# Altium PCB PCB.PcbDoc
Units mm, origin at the board's own origin, x right, y up, seen from the top; angles counter-clockwise.
Board outline 45.4 x 99.85 mm, 2 copper layers (Top Layer, Bottom Layer); 75 components, 50 nets, 225 pads, 76 vias.
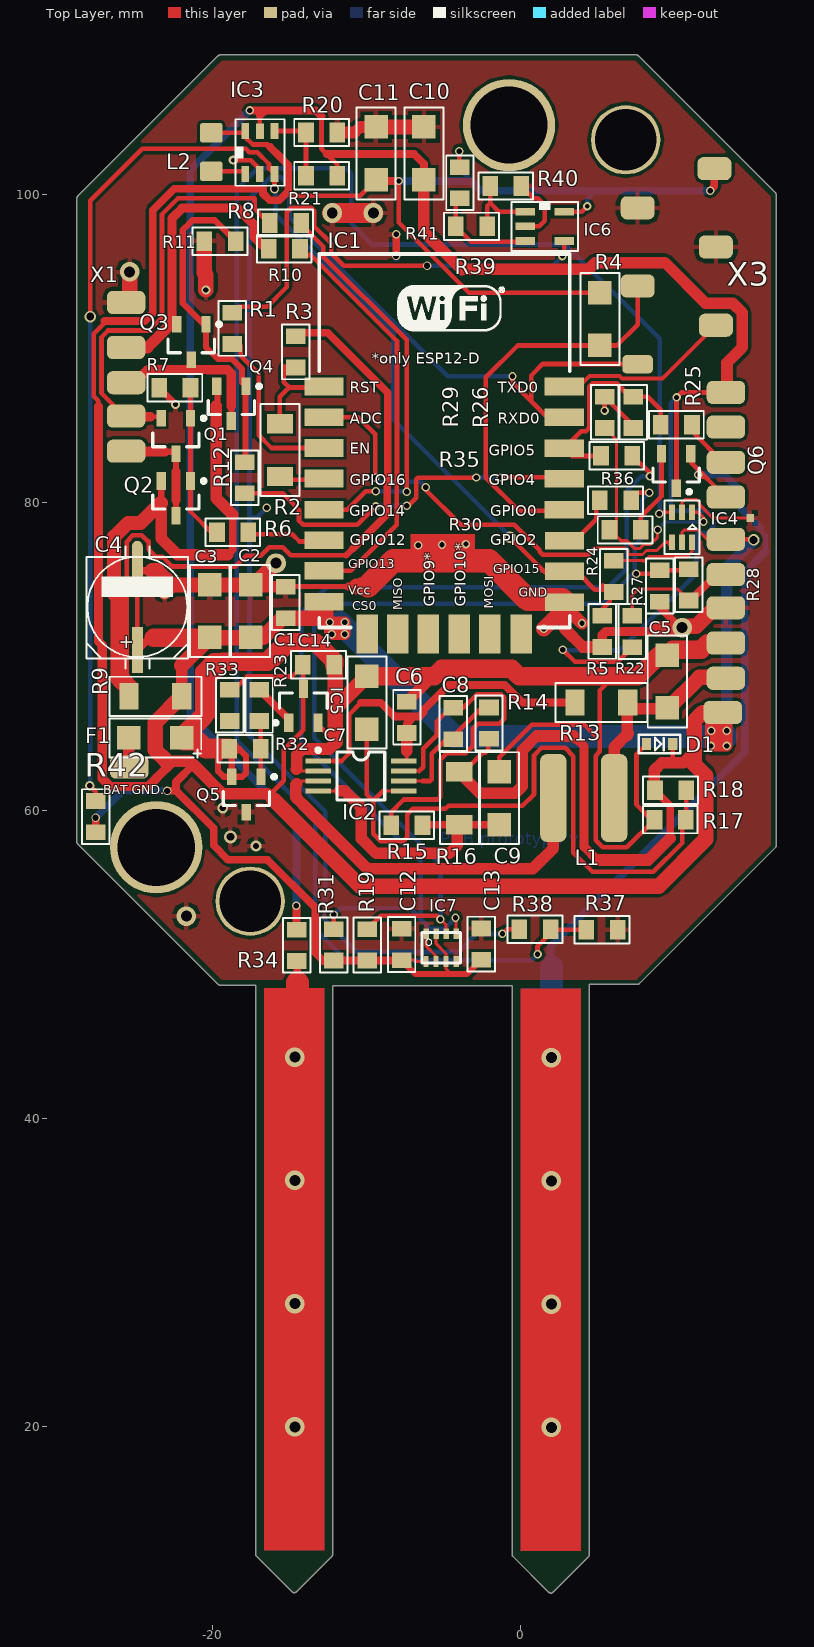
[diagram p0: Top Layer view]
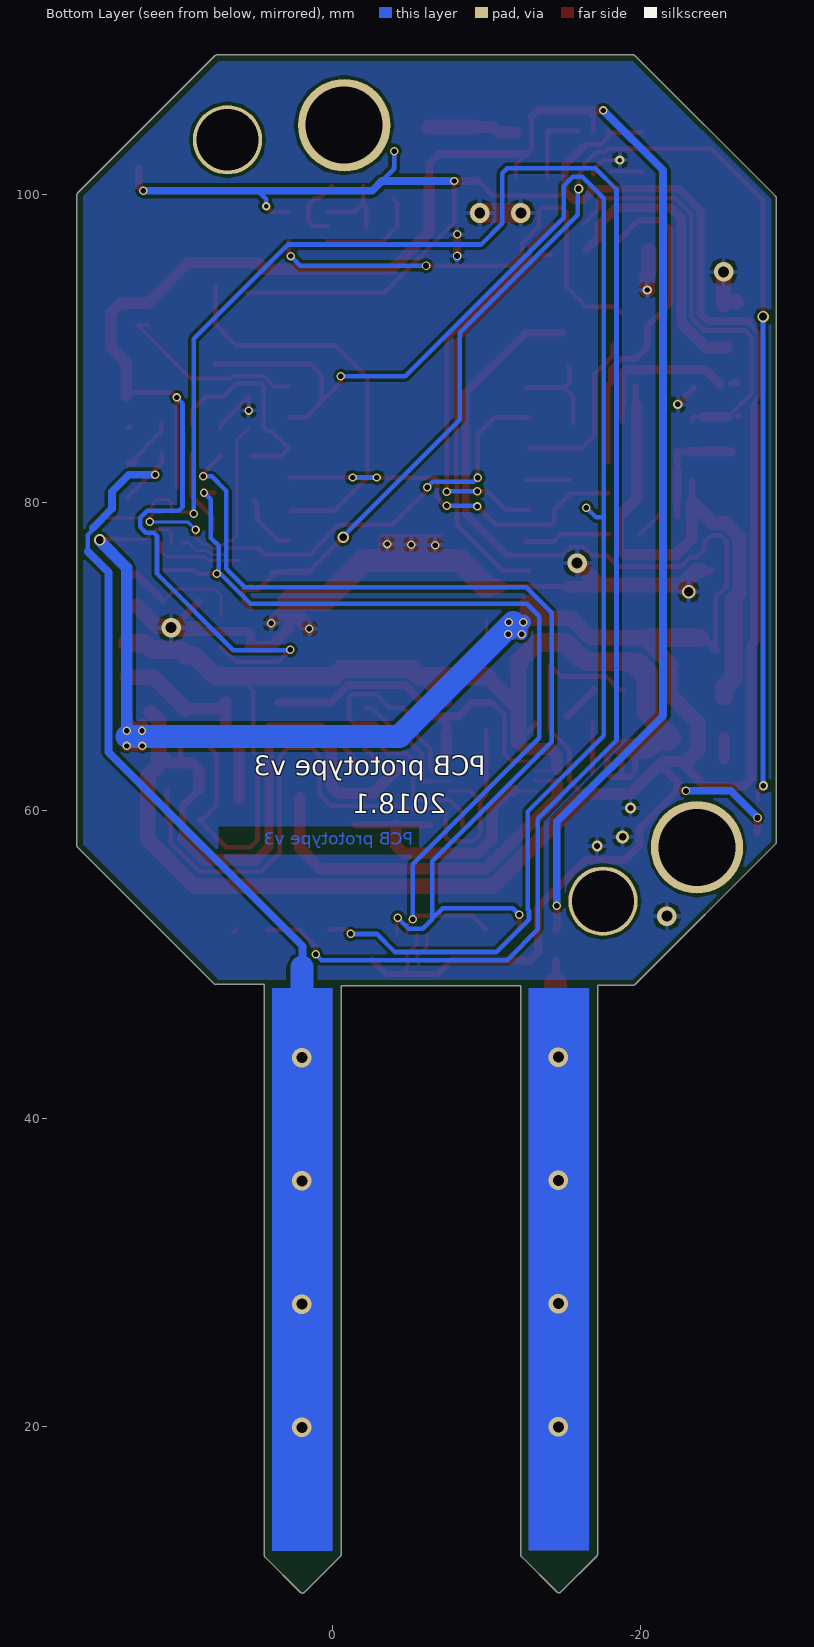
[diagram p1: Bottom Layer view, seen from below]

## Layer stack, top to bottom
Top Layer: signal copper 0.0356
Dielectric: dielectric 0.32, FR-4, Dk 4.8
Bottom Layer: signal copper 0.0356

## Board outline
-17.2,11.725 ccw(c-17,11.725) -17.142,11.583 -14.829,9.271 ccw(c-14.687,9.413) -14.546,9.271 -12.258,11.558 ccw(c-12.4,11.7) -12.2,11.7 -12.2,48.625 -0.55,48.625 -0.55,11.7 ccw(c-0.35,11.7) -0.492,11.558 1.821,9.246 ccw(c1.963,9.387) 2.104,9.246 4.392,11.533 ccw(c4.25,11.675) 4.45,11.675 4.45,48.7 7.574,48.7 ccw(c7.574,48.9) 7.716,48.758 16.542,57.584 ccw(c16.4,57.726) 16.6,57.726 16.6,99.946 ccw(c16.4,99.946) 16.542,100.088 7.652,108.978 ccw(c7.51,108.836) 7.51,109.036 -19.49,109.036 ccw(c-19.49,108.836) -19.632,108.978 -28.742,99.868 ccw(c-28.6,99.726) -28.8,99.726 -28.8,57.946 ccw(c-28.6,57.946) -28.742,57.804 -19.646,48.708 ccw(c-19.504,48.85) -19.504,48.65 -17.2,48.65

## Design rules (kind name [scope] priority, off if disabled: settings)
Clearance [All] p1: gap=0.2
ComponentClearance [All] p1: gap=0.254 collisioncheckmode=3 verticalgap=0.254 showdistances=TRUE
HoleSize [All] p1: absolutevalues=TRUE maxlimit=6.2 minlimit=0.25 maxpercent=80.000 minpercent=20.000
HoleToHoleClearance [All] p1: gap=0.508 allowstackedmicrovias=TRUE
MinimumAnnularRing [All] p1: minimumring=0.076
MinimumSolderMaskSliver [All] p1: minsoldermaskwidth=0.096
PlaneConnect [All] p1: planeconnectstyle=Relief reliefexpansion=0.508 reliefentries=4 reliefconductorwidth=0.5 reliefairgap=0.254
PolygonConnect [All] p1: connectstyle=Relief reliefconductorwidth=0.3 reliefentries=4 polygonreliefangle="90 Angle" airgapwidth=0.254
RoutingCorners [All] p1: cornerstyle=45-Degree minsetback=0.15 maxsetback=5
RoutingVias [All] p1: holewidth=0.45 width=0.6 viastyle="Through Hole" minholewidth=0.4 minwidth=0.55 maxholewidth=6 maxwidth=6.15
SMDNeckDown [All] p1: percent=75.000
ShortCircuit [All] p1 off: allowed=FALSE
SilkToSilkClearance [All] p1 off: silktosilkclearance=0.1
SilkToSolderMaskClearance SilkToSolderMaskClearance_1 [IsPad] p1 off: minsilkscreentomaskgap=0.254 clearancetoexposedcopper=TRUE
SolderMaskExpansion [All] p1: expansion=0.102
Width [All] p1: maxlimit=6 minlimit=0.2 preferedwidth=0.75
19 further rules are at their usual default settings.

## Classes and differential pairs
net class "Voltage Booster": +5V GND GPIO15 NetIC3_1 NetIC3_4 VCC
net class SPV1040: "GND PV." NetC6_1 NetC7_1 NetC8_1 NetC8_2 NetC9_2 NetIC2_3 PV. VCC
net class H-Bridge: GND MOTOR_CONTROL1 MOTOR_CONTROL2 MOTOR_SENSOR1 MOTOR_SENSOR2 NetQ1_1 NetQ1_2 NetQ1_3 NetQ2_2 NetQ3_1 NetQ3_2 NetQ3_3 VCC
net class ESP8266: ADC DELAYED_RESET EN FLOWMETER GND "GND PV." GPIO15 MOTOR_CONTROL1 MOTOR_CONTROL2 MOTOR_SENSOR1 MOTOR_SENSOR2 NetIC1_1 NetIC1_3 NetIC1_4 NetIC1_17 NetIC1_18 NetIC1_22 RXD/VCC SCL SDA/DHT VCC

## Components (designator, comment, footprint, x,y, rotation, side; value= is the part's Value field where it differs from the comment)
C1 "1nF" 0805C-TBD -15.25,72.725 r90 top
C2 "100nf" 1206C-GENERIC -17.525,71.225 r90 top
C3 "22uF" 1206C-GENERIC -20.175,71.225 r90 top
C4 "470uF" PANACAP-D-GENERIC -24.875,73.2 r90 top
C5 "22uF" 1206C-GENERIC 9.525,66.65 r90 top
C6 "1nF" 0805C-TBD -7.375,65.275 r90 top
C7 "1nF" 1206C-GENERIC -9.975,65.275 r90 top
C8 "1uF" 0805C-TBD -4.375,66.4 r270 top
C9 "22uF" 1206C-GENERIC -1.375,62.5 r270 top
C10 "10uF" 1206C-GENERIC -6.275,100.928 r90 top
C11 "22uF" 1206C-GENERIC -9.375,100.928 r90 top
C12 "100nF" 0805C-GENERIC -7.725,50.525 r90 top
C13 "100nF" 0805C-GENERIC -2.55,50.55 r90 top
C14 "22uF" 0805C-GENERIC -13.875,69.45 r0 top
D1 "DIODE-TRANSIL-GENERIC" SOD523 9.875,64.3 r180 top
F1 "" Fuse_1206 -20.6,67.575 r180 top
IC1 "ESP8266 ESP-12-E" "ESP8266 ESP-12-E" 3.825,71.1 r0 top
IC2 "SPV1040" SPV1040 -15.7,66.675 r270 top
IC3 "MCP1623" SOT23-6 -17.875,101.428 r90 top
IC4 "FSA3157" SC70-6 11.125,79.35 r180 top
IC5 "TC54VN2702ECB713" SOT-23A-CB3_L -14.097,66.777 r90 top
IC6 "MAX6433-MAX6435" SOT23-5 0.305,98.857 r0 top
IC7 "BMP280" BMP280 -3.675,49.825 r90 top
L1 "INDUCTOR" "Inductor 6x6mm" 6.075,60.8 r180 top
L2 "INDUCTOR" INDM2520X190N -20.075,102.728 r90 top
Q1 "BSS806N" INF-PG-SOT23_N -22.375,84.3 r270 top
Q2 "IRLML6401" Micro3_N -22.375,80.25 r270 top
Q3 "BSS806N" INF-PG-SOT23_N -21.375,90.4 r270 top
Q4 "IRLML2246" Micro3_N -18.775,86.4 r270 top
Q5 "IRLML6244" INF-PG-SOT23_N -17.8,61.025 r270 top
Q6 "2N3904" SOT23_N 10.1,82.025 r270 top
R1 "4.7K" 0805R-10K -18.725,92.3 r270 top
R2 "0 vagy talan 1K?" 1206FB-50Z -15.625,85.1 r270 top
R3 "10K" 0805R-10K -14.6,90.775 r270 top
R4 "10K" 1206C-GENERIC 5.15,90.175 r90 top
R5 "10K" 0805R-10K 5.3,70.6 r90 top
R6 "390R" 0805R-390 -17.925,78.05 r180 top
R7 "10K" 0805R-10K -21.425,87.425 r180 top
R8 "1K" 0805R-1K -14.5,98.125 r180 top
R9 "1R" 1206FB-50Z -25.425,67.4 r0 top
R10 "1K" 0805R-1K -16.1,96.45 r0 top
R11 "10K" 0805R-10K -18.5,96.95 r180 top
R12 "390R" 0805R-390 -17.9,82.35 r270 top
R13 "1K" 1206FB-50Z 3.525,67 r0 top
R14 "1K" 0805R-1K -2.05,64.9 r90 top
R15 "1K" 0805R-1K -6.625,59.025 r180 top
R16 "530m" 1206FB-50Z -3.975,62.5 r270 top
R17 "360K" 0805R-680K 10.475,59.4 r180 top
R18 "680K" 0805R-680K 8.975,61.3 r0 top
R19 "4K7" 0805R-4K7 -9.95,52.025 r270 top
R20 "261k" 0805R-820K -13.675,104 r0 top
R21 "820k" 0805R-560K -13.675,101.2 r0 top
R22 "4K7" 0805R-4K7 7.25,70.85 r90 top
R23 "470R" 0805R-470 -16.975,67.575 r270 top
R24 "390R" 0805R-390 6.05,74.425 r90 top
R25 "2k2" 0805R-4K7 9.35,85.025 r0 top
R26 "3k3" 0805R-4K7 7.325,85.075 r90 top
R27 "3k3" 0805R-4K7 9.025,73.8 r90 top
R28 "2k2" 0805R-4K7 10.925,75.4 r270 top
R29 "2k2" 0805R-4K7 5.45,86.6 r270 top
R30 "8k2" 0805R-4K7 6.025,78.2 r0 top
R31 "4K7" 0805R-4K7 -12.125,52.025 r270 top
R32 "150K" 0805R-150K -17.125,64 r180 top
R33 "10K" 0805R-10K -18.875,65.8 r90 top
R34 "100R" 0805R-100 -14.525,52 r270 top
R35 "22R" 0805R-22 7,83.025 r180 top
R36 "22R" 0805R-22 6.925,80.125 r180 top
R37 "2k2 1%" 0805R-1K 6.05,52.25 r180 top
R38 "8k2 1%" 0805R-4K7 0.171,52.275 r0 top
R39 "931K" 0805R-TBD -3.937,99.974 r90 top
R40 "237K" 0805R-TBD -1.725,100.525 r0 top
R41 "22K" 0805R-TBD -3.95,97.9 r0 top
R42 "0" 0805R-TBD -27.584,58.826 r90 top
X1 "Component_1" Szelep_csati -26.875,82.55 r0 top
X3 "X?" "program port" 7.6,88.95 r0 top

## Footprints (in the part's own frame and the unit in brackets; to place one, negate y for a bottom-side part, rotate by r counter-clockwise, add the part's x,y. Pads: shape width x height; smd on the part's side, far side on the other; paste and mask are expansions set on the pad)
0805C-GENERIC [mil] "CAPACITOR 0805"
  rect 40x50 smd: 1(-10,0) 2(70,0)
  silkscreen extent -40,-35 100,35, body extent -11,-25 70,25, height 26
0805C-TBD [mil] "CAPACITOR 0805"
  rect 40x50 smd: 1(-10,0) 2(70,0)
  silkscreen extent -40,-35 100,35, body extent -11,-25 70,25, height 26
0805R-1K [mil] "RESISTOR 0805"
  rect 40x50 smd: 1(-10,0) 2(70,0)
  silkscreen extent -40,-35 100,35, body extent -11,-25 70,25, height 27
0805R-4K7 [mil] "RESISTOR 0805"
  rect 40x50 smd: 1(-10,0) 2(70,0)
  silkscreen extent -40,-35 100,35, body extent -11,-25 70,25, height 27
0805R-10K [mil] "RESISTOR 0805"
  rect 40x50 smd: 1(0,0) 2(80,0)
  silkscreen extent -30,-35 110,35, body extent -1,-25 80,25, height 27
0805R-22 [mil] "RESISTOR 0805"
  rect 40x50 smd: 1(-10,0) 2(70,0)
  silkscreen extent -40,-35 100,35, body extent -11,-25 70,25, height 27
0805R-100 [mil] "RESISTOR 0805"
  rect 40x50 smd: 1(-10,0) 2(70,0)
  silkscreen extent -40,-35 100,35, body extent -11,-25 70,25, height 27
0805R-150K [mil] "RESISTOR 0805"
  rect 40x50 smd: 1(-10,0) 2(70,0)
  silkscreen extent -40,-35 100,35, body extent -11,-25 70,25, height 27
0805R-390 [mil] "RESISTOR 0805"
  rect 40x50 smd: 1(-10,0) 2(70,0)
  silkscreen extent -40,-35 100,35, body extent -11,-25 70,25, height 27
0805R-470 [mil] "RESISTOR 0805"
  rect 40x50 smd: 1(-10,0) 2(70,0)
  silkscreen extent -40,-35 100,35, body extent -11,-25 70,25, height 27
0805R-560K [mil] "RESISTOR 0805"
  rect 40x50 smd: 1(-10,0) 2(70,0)
  silkscreen extent -40,-35 100,35, body extent -11,-25 70,25, height 27
0805R-680K [mil] "RESISTOR 0805"
  rect 40x50 smd: 1(-10,0) 2(70,0)
  silkscreen extent -40,-35 100,35, body extent -11,-25 70,25, height 27
0805R-820K [mil] "RESISTOR 0805"
  rect 40x50 smd: 1(-10,0) 2(70,0)
  silkscreen extent -40,-35 100,35, body extent -11,-25 70,25, height 27
0805R-TBD [mil] "RESISTOR 0805 VALUE TO BE DETERMINED"
  rect 40x50 smd: 1(-10,0) 2(70,0)
  silkscreen extent -40,-35 100,35, body extent -11,-25 70,25, height 27
1206C-GENERIC [mil] "Polarized Capacitor (Radial); 2 Leads"
  rect 60x60 smd: 1(0,0) 2(135,0)
  silkscreen extent -50,-50 185,50, body extent -8,-29 147,29, height 46
1206FB-50Z [mm] "FERRITE BEAD 1206"
  rect 1.25x1.7 smd: 1(0,0) 2(3.429,0)
  silkscreen extent -1.27,-1.27 4.7,1.27, body extent 0.11,-0.81 3.31,0.8, height 0.84
BMP280 [mm]
  rect 0.7x0.35 smd: 1(2.156,2.458) 2(2.156,1.808) 3(2.156,1.158) 4(2.156,0.508) 5(0.358,0.501) 6(0.358,1.164) 7(0.358,1.814) 8(0.358,2.464)
  silkscreen extent 0.25,0.23 2.25,2.73
"ESP8266 ESP-12-E" [mil] "ESP8266 ESP-12-E"
  rect 100x45 smd: 1(-653,646) 2(-653,568) 3(-653,489) 4(-653,411) 5(-653,331) 6(-653,253) 7(-653,175) 8(-653,96) 15(-38,95) 16(-38,174) 17(-38,252) 18(-39,331) 19(-39,410) 20(-39,488) 21(-39,568) 22(-39,646)
  rect 55x100 smd: 9(-543,14) 10(-465,14) 11(-387,14) 12(-307,14) 13(-229,14) 14(-149,14)
  silkscreen extent -665,30 -25,985, body extent -661,37 -31,981, height 86
Fuse_1206 [mil]
  rect 60x60 smd: 1(55,113) 2(190,113)
  silkscreen extent 5,63 240,163
INDM2520X190N [mm] "Inductor, molded body 2.5x2.0mm"
  round 0.508 on Mech15: 0(0,0)
  rrect20% 1.25x1.45 smd: 1(-1.25,0) 2(1.25,0)
  Top Layer pour cut-out: -0.7,1 0.7,1 0.7,-1 -0.7,-1
  body extent -1.25,-1 1.25,1, height 1.79
"Inductor 6x6mm" [mm]
  rrect50% 1.7x5.7 smd: 1(0,0) 2(3.95,0)
INF-PG-SOT23_N [mm] "SOT23, 3-Leads, Body 2.9x1.3mm, Pitch 0.95mm, IPC Medium Density"
  rect 1.05x0.6 smd: 1(-1.15,0.95) 2(-1.15,-0.95) 3(1.15,0)
  silkscreen extent -1.27,-1.5 0.7,1.93, body extent -0.7,-1.5 0.7,1.5, height 1.1
Micro3_N [mm] "SOT23, 3-Leads, Body 2.9x1.3mm, Pitch 0.95mm, Lead Span 2.3mm, IPC Medium Density"
  rect 1.15x0.6 smd: 1(-1.125,0.95) 2(-1.125,-0.95) 3(1.125,0)
  silkscreen extent -1.25,-1.5 0.7,1.93, body extent -0.7,-1.5 0.7,1.5, height 1.12
PANACAP-D-GENERIC [mm] "Radial Cap, Thru-Hole; 2 Leads; 0.3 in Pin Spacing"
  rect 3x0.7 smd: +(-2.794,0)
  oval 3x0.7 smd: -(2.794,0)
  silkscreen extent -4,-3.3 3.93,3.3, body extent -3.5,-3.3 3.5,3.3, height 5.4
"program port" [mm]
  rrect50% 2x1.2 smd: 1(0,0)
  rrect50% 2.2x1.5 smd: 2(5.08,2.54) 3(0,5.08) 4(5.08,7.62) 5(0,10.16) 6(4.98,12.7)
SC70-6 [mm]
  rect 0.4x1 smd mask+0.05: 1(0,0) 2(0.65,0) 3(1.3,0) 4(1.3,1.95) 5(0.65,1.95) 6(0,1.95)
  silkscreen extent -0.48,-0.75 1.78,2.7, body extent -0.48,0 1.78,1.96, height 1.04
SOD523 [mm]
  rect 0.6x0.8 smd: A(1.7,0) K(0,0)
  silkscreen extent -0.5,-0.6 2.2,0.6, body extent -0.05,-0.53 1.75,0.55, height 0.53
SOT23-5 [mil]
  rect 50x20 smd: 1(0,0) 2(0,-37) 3(0,-75) 4(100,-75) 5(100,0)
  silkscreen extent -35,-100 135,25, body extent 2,-95 98,20, height 52
SOT23-6 [mil]
  rect 40x20 smd: 1(-5,0) 2(-5,-37) 3(-5,-75) 4(105,-75) 5(104.41,-37.4) 6(105,0)
  silkscreen extent -35,-100 135,25, body extent 2,-95 98,20, height 52
SOT23_N [mm] "SOT23, 3-Leads, Body 2.9x1.3mm, Pitch 0.95mm, Lead Span 2.3mm - Reverse Pinning, IPC Medium Density"
  rect 1.15x0.6 smd: 1(1.125,0) 2(-1.125,-0.95) 3(-1.125,0.95)
  silkscreen extent -0.2,-1.5 1.47,1.5, body extent -0.7,-1.5 0.7,1.5, height 1.1
SOT-23A-CB3_L [mm] "SOT346, 3-Leads, Body 2.9x1.5mm, Pitch 0.95mm, Lead Span 2.6mm, IPC High Density"
  rect 1.2x0.6 smd: 1(-1.1,0.95) 2(-1.1,-0.95) 3(1.1,0)
  silkscreen extent -1.22,-1.55 0.85,1.92, body extent -0.85,-1.55 0.85,1.55, height 1.45
SPV1040 [mm] "SOT346, 3-Leads, Body 2.9x1.5mm, Pitch 0.95mm, Lead Span 2.6mm, IPC High Density"
  rect 0.3x1.65 smd: 1(3.47,2.559) 2(4.12,2.559) 3(4.77,2.559) 4(5.42,2.559) 5(5.42,8.109) 6(4.77,8.109) 7(4.12,8.109) 8(3.47,8.109)
  silkscreen extent 2.65,2.43 5.99,6.88
Szelep_csati [mm]
  rrect50% 2.5x1.5 smd: "1 - Fekete"(1.27,10.414) "2 - Zöld"(1.27,7.493) "3 - Kék"(1.27,5.207) "4 - Piros"(1.27,3.048) "5 - Sárga"(1.27,0.762)

## Part data
C1 C6: library part 0805C-100nF-25V-X7R-MUR, "CAPACITOR 0805 CERAMIC"
C2 C3 C5 C7 C9 C10 C11: library part 1206C-10U-35V-X7R, "GENERIC CAPACITOR NON POLARISED 1206"
C4: library part C+47U-6V3, "GENERIC CAPACITOR POLARISED"
C8: library part 0805C-TBD, "CAPACITOR 0805 CERAMIC VALUE TO BE DETERMINED"
C12 C13: library part C0805-GENERIC
C14: library part C0805-GENERIC, "GENERIC CAPACITOR NON POLARISED0603"
D1: "GENERIC TRANSIL"
F1: library part Fuse
IC5: "1µA Voltage Detector, Open-Drain Output, 2.7V, 3-Pin SOT-23A, Industrial Temperature, Tape and Reel"
Q1 Q3: "N-Channel OptiMOS 2 Small-Signal-Transistor, 20 V VDS, 2.3 A ID, -55 to 150 degC, PG-SOT23, Reel, Green"
Q2: "HEXFET Power MOSFET"
Q4: library part IRLML6401, "HEXFET Power MOSFET"
Q5: library part BSS806N, "N-Channel OptiMOS 2 Small-Signal-Transistor, 20 V VDS, 2.3 A ID, -55 to 150 degC, PG-SOT23, Reel, Green"
Q6: "NPN General Purpose Amplifier"
R1 R3 R4 R5 R7 R11 R33: library part 0805R-10K, "RESISTOR 0805 1/4 WATT THIN FILM"
R2 R9 R13 R16: library part 0805R-1R, "RESISTOR 0805 1/3 WATT"
R6 R12 R24: library part 0805R-390, "RESISTOR 0805 1/4 WATT THIN FILM"
R8 R10 R14 R15 R37: library part 0805R-1K, "RESISTOR 0805 1/4 WATT THIN FILM"
R17 R18: library part 0805R-680K, "RESISTOR 0805 1/4 WATT THIN FILM"
R19 R22 R25 R26 R27 R28 R29 R30 R31 R38: library part 0805R-4K7, "RESISTOR 0805 1/4 WATT THIN FILM"
R20: library part 0805R-820K, "RESISTOR 0805 1/4 WATT THIN FILM"
R21: library part 0805R-560K, "RESISTOR 0805 1/4 WATT THIN FILM"
R23: library part 0805R-470, "RESISTOR 0805 1/4 WATT THIN FILM"
R32: library part 0805R-150K, "RESISTOR 0805 1/4 WATT THIN FILM"
R34: library part 0805R-100, "RESISTOR 0805 1/4 WATT THIN FILM"
R35 R36: library part 0805R-22, "RESISTOR 0805 1/4 WATT THIN FILM"
R39 R40 R41 R42: library part 0805R-TBD, "RESISTOR 0805 VALUE TO BE DETERMINED"
X1: library part szelep_csati1
X3: library part "program port"

## Free pads (board coordinates)
  round 6 hole 5: 0(-23.65,57.6) 1(-0.75,104.475)
  rect 0.5x0.5 smd: 0(14.9,78.975)
  rrect50% 2.5x1.5 smd: 1(13.325,87.125) 2(13.325,84.875) 3(13.325,82.589) 4(13.325,80.339) 5(13.325,77.589) 6(13.325,75.303) 7(13.325,73.144) 8(13.325,70.858) 9(13.325,68.572) 9(13.325,68.572) 10(13.125,66.35) 11(-25.4,62.8)
  round 4.5 hole 4: 2(6.825,103.525) 3(-17.55,54.1)

## Via types
v1: diameter 0.55, hole 0.35, Top Layer to Bottom Layer, 45 vias
v2: diameter 1.27, hole 0.711, Top Layer to Bottom Layer, 14 vias
v3: diameter 0.55, hole 0.4, Top Layer to Bottom Layer, 4 vias
v4: diameter 0.6, hole 0.35, Top Layer to Bottom Layer, 3 vias
v5: diameter 0.75, hole 0.5, Top Layer to Bottom Layer, 3 vias
v6: diameter 0.7, hole 0.4, Top Layer to Bottom Layer, 2 vias
v7: diameter 0.6, hole 0.3, Top Layer to Bottom Layer, 1 vias
v8: diameter 0.6, hole 0.4, Top Layer to Bottom Layer, 1 vias
v9: diameter 0.85, hole 0.5, Top Layer to Bottom Layer, 1 vias
v10: diameter 0.9, hole 0.6, Top Layer to Bottom Layer, 1 vias
v11: diameter 0.55, hole 0.3, Top Layer to Bottom Layer, 1 vias

## Nets (pads, with @x,y where several pads share a name; then routed paths per layer and width w, separated by ;. In a path a pad name is that pad's centre, name@x,y a point inside that pad or via, vN(x,y) a via of type N, cw(c..) or ccw(c..) an arc to the next point about the centre after c; other vN are vias at no path point)
+5V: C10.1 IC3.5 pad.1@13.325,87.125 Q6.1 R21.2 R22.1 R34.1 | length 149.3
  Top Layer w0.3: IC3.5 -16.925,105.078 ; -12.926,105.051 -12.926,102.951 -12.575,102.6 -11.897,101.922 R21.2 ; v1(2.75,70.425) 3.533,69.642 6.296,69.642 R22.1 ; Q6.1@10.125,80.925 v1(10.125,86.8) 10.45,87.125 13.175,87.125 pad.1@13.4,86.9
  Top Layer w0.5: v1(-17.572,105.428) -16.575,105.428 ; -16.925,105.078 -16.575,105.428 ; v1(-14.55,53.8) -14.55,52.279 R34.1 ; -12.926,105.051 -13.303,105.428 -16.575,105.428 ; -12.575,102.6 -6.905,102.6 -6.275,101.97 C10.1
  Top Layer w0.75: C10.1 -6.275,97.555 -3.825,95.105 -3.8,95.13 4.43,95.13 4.855,95.555 9.373,95.555 12.002,92.925 13.775,92.925 14.4,92.3 14.4,90.05 13.4,89.05 pad.1@13.4,86.9
  Bottom Layer w0.3: v1@2.75,70.4 6.45,70.4 11.4,75.35 11.4,77.825 11.6,78.025 12.134,78.025 12.5,78.391 12.5,78.984 12.034,79.45 9.975,79.45 9.746,79.679 9.746,86.421 v1(10.125,86.8)
  Bottom Layer w0.5: -21.45,67.175 -21.45,66.15 ; v1(-17.572,105.428) -21.45,101.55 -21.45,66.15 ; v1(-14.55,53.8) -14.55,59.25 -21.45,66.15
ADC: IC1.2 IC4.4 | length 29.9
  Top Layer w0.2: 4.819,77.011 6.809,77.011 6.985,76.835 6.985,76.603 7.917,76.603 8.176,76.862 8.847,76.862 9.385,77.4 IC4.4 IC4.4@9.65,77.225
  Top Layer w0.3: IC1.2 IC1.2@-12.282,85.527 ; IC1.2@-12.55,85.45 -12.359,85.45 IC1.2@-12.282,85.527 ; v1(-9.425,81.6) -9.425,84.425 -10.527,85.527 IC1.2@-12.282,85.527 ; v1(-6.15,80.975) -6.2,80.925 -6.275,80.925 -3.875,78.525 -0.4,78.525 1.24,76.886 1.24,76.784 1.445,76.579 4.387,76.579 4.819,77.011
  Bottom Layer w0.3: v1@-9.35,81.775 -9.475,81.65 -9.151,81.325 -6.5,81.325 v1(-6.15,80.975)
DELAYED_RESET: R33.1
EN: IC6.4 R1.1 | length 30.9
  Top Layer w0.3: R1.1 -18.468,92.557 -18.325,92.7 -16.45,92.7 -15.18,93.97 -15.18,98.829 -14.899,99.11 -13.593,99.11 -13.388,98.905 -13.388,98.511 -13.388,97.898 -12.297,96.807 -12.297,96.168 -11.481,95.352 v3(-6.071,95.352) ; v1(2.72,95.98) 2.845,96.104 IC6.4
  Bottom Layer w0.3: v3(-6.071,95.352) 2.092,95.352 v1(2.72,95.98)
FLOWMETER: IC1.20 R25.1 R26.2 R35.2 | length 13.8
  Top Layer w0.3: R35.2@5.2,83 3.33,83 IC1.20 3.945,84.606 4.249,84.606 4.465,84.821 4.465,87.507 4.67,87.712 6.23,87.712 7.089,86.853 R26.2 8.247,86.853 9.096,86.004 R25.1
GND: "X1.1 - Fekete" C1.2 C2.2 C3.2 C4.- C10.2 C11.2 C12.2 C13.2 IC1.15 IC3.2 IC4.2 IC6.2 IC7.1 IC7.5 IC7.7 pad.0@14.9,78.975 pad.7 Q5.3 R5.1 R7.2 R11.2 R20.2 R26.1 R27.1 R29.1 R37.1 R40.2 X3.4 X3.5 | length 87
  Top Layer w0.2: IC7.1@-6.133,51.956 -6.133,51.183 -5.489,50.539 IC7.7@-5.489,50.158 ; IC7.7@-5.564,49.933 IC7.7@-5.564,50.239 ; IC4.2 10.475,79.976 10.675,80.175 11.424,80.175 11.625,79.974 11.625,79.834 12.484,78.975 pad.0@14.875,78.975
  Top Layer w0.3: v7(-18.644,102.21) -17.526,102.21 -16.935,101.618 IC3.2 ; C1.2@-15.25,74.525 -11.175,74.525 ; R40.2 0.858,99.72 1.118,99.72 1.575,99.263 1.575,98.273 1.219,97.917 IC6.2 ; v1(5.45,85.95) R29.1 7.3,85.004 R26.1@7.3,84.8 ; R37.1 R37.1@6.422,52.132
  Top Layer w0.4: R7.2 -22.4,86.368 v4(-22.4,86.35)
  Top Layer w0.5: C4.-@-24.544,75.544 -23.906,75.544 ; -11.175,74.525 -10.675,74.525 ; v3(-8.077,95.987) v1(-8.077,97.384) ; R27.1@8.725,73.5 9.146,73.079 10.362,71.863 10.375,71.85 v2@10.575,71.85
  Top Layer w0.6: R5.1 5.3,71.375 5.537,71.612 8.662,71.612
  Top Layer w0.75: C2.2@-17.7,74.625 -17.6,74.525 -15.35,74.525 C1.2@-15.35,74.45 ; R20.2 -10.775,104 -10.418,104.357 C11.2 ; IC1.15@1.802,73.676 IC1.15@1.902,73.575 ; IC1.15 2.86,73.14 2.86,71.79 4.05,70.6 R5.1 R5.1@5.35,70.6
  Top Layer w0.8: IC1.15@2.984,73.14 v1(3.988,72.136)
  Top Layer w1: -26.23,92.964 -26.13,93.064 ; -25.375,92.8 v2(-25.375,94.95) ; -23.906,75.544 -23.594,75.544 -22.675,74.625 ; v10(-23.114,74.186) -22.675,74.625 ; -20.532,96.3 -20.532,94.882 -20.425,94.775 v4(-20.425,93.775) ; C3.2@-20.2,74.625 -22.675,74.625 ; C3.2@-20.175,74.625 C2.2@-17.7,74.625 ; C2.2 -17.271,74.654 v2(-15.875,76.05) ; -10.675,74.525 -10.65,74.55 -10.252,74.55 ; v2(-9.55,98.775) -9.525,98.775 v2@-9.5,98.8 ; C11.2@-9.257,104.357 C10.2 ; v1(1.51,71.79) IC1.15@2.86,73.14 ; 8.85,71.775 10.275,71.775 10.362,71.863 10.45,71.95 11.407,71.95 pad.7@12.707,73.25
  Top Layer w1.2: -10.252,74.55 -9.905,74.55
  Top Layer w1.3: v2(-12.225,98.775) v2(-9.55,98.775)
  Top Layer w1.5: -9.905,74.55 -8.255,76.2 -2.048,76.2 0.477,73.676 1.802,73.676 2.697,73.676 IC1.15
  Bottom Layer w0.5: v3@-8.077,95.86 v3(-8.077,95.987)
  Bottom Layer w1: v2(-15.875,76.05) v2@-15.85,76.075 ; v2@-15.875,76.1 v2@-15.85,76.075 ; v2@-15.75,76.175 v2@-15.85,76.075
  other v1: -6.655,77.216 -5.1,77.25 -3.545,77.284
  other v2: -21.7,53.125 10.481,71.854
  other v6: -17.17,57.683 -19.329,60.147
  other v9: -18.825,58.275
"GND PV.": C5.2 C6.2 C7.2 C9.1 C14.2 D1.A F1.1 IC2.2 IC5.2 pad.8 Q5.2 R17.2 R32.2 | length 110
  Top Layer w0.2: -14.53,62.555 IC2.2
  Top Layer w0.3: IC5.2 -13.147,65.56 -12.037,64.45 ; C9.1 -1.375,63.438 0.737,65.55 1.55,65.55 4.15,65.55 5.15,64.55 ; 6.1,68.725 6.067,68.692 5.15,67.775 5.15,64.55 ; D1.A 7.525,63.65 7.525,60.35 8.475,59.4 R17.2 6.897,57.6 5.329,57.6 4.875,58.054 4.875,63.546 5.15,63.821 5.15,64.55
  Top Layer w0.4: Q5.2@-18.75,62.475 R32.2@-18.75,63.85 ; -19.634,62.535 -19.274,62.175 Q5.2 -18.064,62.175 -17.831,62.408 -17.831,63.551 -18.28,64 R32.2 -19.634,63.269 -19.634,62.535
  Top Layer w0.75: -14.55,62.675 -14.541,62.684 -14.541,63.593 -14.225,63.909 -14.225,63.98 -12.425,63.98 -11.912,64.493 ; -13.375,71 -12.097,69.722 C14.2@-12.037,69.662 ; C6.2 -5.75,68.678
  Top Layer w1: -20.621,66.081 -20.621,69.011 -19.919,69.713 -16.382,69.713 -16.07,69.713 -14.898,70.885 -14.783,71 -13.375,71 ; -12.037,64.45 -12.037,66.642 ; C14.2@-12.037,69.662 -12.037,66.642 ; C7.2 -12.037,66.642
  Top Layer w1.2: -20.31,66.392 -20.31,68.671 -19.344,69.637 -16.458,69.637 -16.382,69.713 -15.21,70.885 -14.898,70.885 -13.29,70.885 -12.127,69.722 -12.097,69.722 C14.2 ; C7.2 -5.589,68.704 -5.107,69.186 -0.587,69.186 -0.093,68.692 6.067,68.692 7.62,68.692 9.007,70.079 C5.2 ; C5.2@9.865,70.419 11.714,70.419 12.153,70.858 pad.8
  Top Layer w1.3: -20.621,66.081 F1.1 -21.835,64.543 -21.01,64.543 -20.468,64 R32.2
GPIO15: IC1.16 IC3.3 R5.2 R24.1 R42.2 | length 95.6
  Top Layer w0.3: v4(-27.965,61.595) -27.584,61.214 R42.2 ; v5(-27.94,92.05) -27.94,99.568 -24.562,102.946 -17.826,102.946 -17.602,102.722 -17.099,102.722 -16.331,101.954 -16.331,101.662 IC3.3 v8(-15.97,100.35) ; v5(-0.686,77.724) 1.488,75.55 ; 1.4,75.55 1.488,75.55 ; IC1.16@2.925,75.52 3.63,75.52 IC1.16@3.7,75.45 ; IC1.16@2.925,75.55 1.488,75.55 ; IC1.16@3.975,75.45 IC1.16@3.7,75.45 ; R5.2@5.3,73.05 5.8,73.55 R24.1@5.8,74.325 ; 5.325,74.342 5.3,74.342 ; 5.325,74.596 5.3,74.571 5.3,74.342 ; R24.1@5.8,74.346 R24.1@5.8,74.325 ; R24.1@5.825,74.325 R24.1@5.8,74.325 ; 1.488,75.55 1.588,75.45 IC1.16@3.7,75.45 ; IC1.16@3.7,75.45 4.825,74.325 5.3,74.325 ; 5.3,74.325 R24.1@5.8,74.325 ; 5.3,74.325 5.3,74.342
  Bottom Layer w0.3: v4(-27.965,61.595) -27.94,61.62 v5(-27.94,92.05) ; v8(-15.97,100.35) -15.9,100.28 -15.9,98.65 -8.25,91 -8.25,85.35 v5@-0.655,77.755
MOTOR_CONTROL1: IC1.19 R12.2 | length 23.9
  Top Layer w0.3: R12.2 -15.447,80.572 -14.381,79.506 -14.381,78.791 -14.115,78.525 -10.6,78.525 v1(-9.4,79.725) ; v1@-7.287,79.779 -6.775,80.291 -6.775,81.5 -6.675,81.6 -2.871,81.6 v1(-2.875,81.604) ; v1(-1.296,81.604) -1.275,81.625 2.723,81.625 IC1.19
  Bottom Layer w0.3: v1(-9.4,79.725) -9.35,79.775 v1(-7.4,79.775) ; v1(-2.875,81.604) v1(-1.296,81.604)
MOTOR_CONTROL2: IC1.6 R6.1 | length 5.6
  Top Layer w0.3: R6.1@-17.921,77.925 -14.825,77.925 -14.35,77.45 IC1.6@-12.55,77.45
MOTOR_SENSOR1: IC1.7 R10.2 | length 26.3
  Top Layer w0.3: R10.2@-14.147,96.05 -13.609,96.05 -8.025,90.466 -8.025,81.226 -8.05,81.201 -8.05,78.525 -11.03,75.545 IC1.7
MOTOR_SENSOR2: IC1.5 R8.1 | length 26.4
  Top Layer w0.3: R8.1@-14.272,98.075 -12.797,96.6 -12.797,95.945 -7.4,90.548 v1@-7.4,80.55 ; IC1.5 -11.243,79.507 -10.05,80.7 v1(-9.4,80.7) ; v1@-7.4,80.55 v1(-7.4,80.679)
  Bottom Layer w0.3: v1(-9.4,80.7) -7.421,80.7 v1(-7.4,80.679)
NetC6_1: C6.1 IC2.1 IC2.8 R13.1 | length 24.6
  Top Layer w0.2: IC2.1 -12.155,63.205 ; IC2.8@-7.55,63.2 -7.375,63.375 -7.375,63.85
  Top Layer w0.3: -12.155,63.205 -11.63,63.205 ; -11.625,63.2 -11.137,63.688 -11.137,66.203 -10.365,66.975
  Top Layer w0.5: -10.363,66.973 -9.074,66.973 -8.196,66.095 -6.905,66.095 ; C6.1 -7.375,65.625 -6.905,66.095 ; R13.1 0.114,67 -1.022,68.136 -4.672,68.136 -6.29,66.518 -6.29,66.359 -6.554,66.095 -6.905,66.095
  Top Layer w0.75: -7.375,63.85 C6.1
NetC7_1: C7.1 IC2.5 R17.1 R18.2 | length 45.6
  Top Layer w0.2: -8.95,61.25 IC2.5@-7.6,61.25
  Top Layer w0.3: C7.1@-9.975,65.2 -9.975,61.025 -9.575,60.625 ; -8.95,61.25 -9.575,60.625 ; R17.1 10.496,59.167 10.496,57.879 8.617,56 4.666,56 3.425,57.241 3.425,63.517 2.892,64.05 1.358,64.05 0.875,63.567 0.875,61.05 0.125,60.3 -4.675,60.3 -4.879,60.096 -7.009,60.096 -7.35,59.755 -7.35,58.25 -7.625,57.975 -7.64,57.99 -9.077,57.99 -9.575,58.488 -9.575,60.625 ; R17.1@10.753,59.378 R18.2
NetC8_1: C8.1 IC2.7 R15.2 | length 24
  Top Layer w0.2: IC2.7 -6.57,62.555 -6.545,62.555
  Top Layer w0.3: R15.2 -8.403,59.872 -7.575,60.7 -5.375,60.7 -5.225,60.85 -5.225,63.291 -4.802,63.714 -3.574,63.714 -3.085,64.203 -3.085,65.32 -2.78,65.625 -1.394,65.625 -1.065,65.954 -1.065,67.331 -1.27,67.536 -2.83,67.536 -3.712,66.654 C8.1 ; -6.57,62.555 -6.325,62.8 -6.325,63.985 -5.41,64.9 ; -5.41,64.925 -5.425,64.91 -5.425,65.775 C8.1@-4.55,66.65 ; C8.1@-4.5,66.675 C8.1@-4.475,66.65
NetC8_2: C8.2 IC2.6 R14.2 | length 8.5
  Top Layer w0.2: IC2.6 -6.38,61.905
  Top Layer w0.3: -6.38,61.905 -5.87,61.905 -5.775,62 -5.775,63.675 -4.825,64.625 C8.2@-4.375,64.625 ; C8.2 C8.2@-4.375,64.625 ; R14.2@-2.1,66.65 -2.532,66.65 -4.375,64.807 C8.2@-4.375,64.625
NetC9_2: C9.2 IC2.4 R15.1 R16.2 | length 18.4
  Top Layer w0.2: IC2.4@-13.25,61.25 -11.75,61.25
  Top Layer w0.25: -11.4,61.25 -11.375,61.225
  Top Layer w0.5: R15.1@-6.296,59.071 R16.2 -1.504,59.071 C9.2@-1.475,59.1
  Top Layer w0.75: -11.75,61.275 -11.425,61.275 -11.4,61.25 ; -11.375,61.225 -10.35,60.2 -10.35,58.167 -9.383,57.2 -4.625,57.2 -4.1,57.725 R16.2@-4.1,59.025
NetF1_2: F1.2 pad.11 | length 1.4
  Top Layer w0.75: pad.11@-25.426,63.351 F1.2
NetIC1_1: IC1.1 R2.1 R3.2 | length 6.6
  Top Layer w0.3: R2.1@-15.625,85.125 -15.625,86.85 -15.025,87.45 ; -15.325,88.818 -15.375,88.768 -15.375,87.8 -15.025,87.45 ; IC1.1@-12.55,87.45 -15.025,87.45
NetIC1_3: IC1.3 R1.2 | length 11
  Top Layer w0.3: R1.2@-18.25,90.218 -18.175,90.143 -18.175,89.518 -17,88.343 -17,84.35 -16.171,83.521 IC1.3
NetIC1_4: IC1.4 R2.2 | length 2.8
  Top Layer w0.3: R2.2@-15.379,81.45 IC1.4@-12.55,81.45
NetIC1_17: IC1.17 R36.2 | length 4
  Top Layer w0.3: IC1.17 3.526,77.501 4.913,78.888 4.913,79.891 R36.2
NetIC1_18: IC1.18 R4.1 X3.3 | length 26.1
  Top Layer w0.3: IC1.18@2.7,79.45 -0.1,79.45 -2.25,81.6 -2.25,87.85 -2.25,88.1 -0.175,90.175 R4.1 6.25,90.175 7.6,91.525 X3.3
NetIC1_22: IC1.22 X3.2 | length 12.4
  Top Layer w0.254: IC1.22 3.792,87.508 4.472,88.189 6.428,88.189 6.594,88.023 9.213,88.023 X3.2 X3.2@11.956,91.49
NetIC2_3: IC2.3 L1.2 | length 24.6
  Top Layer w0.2: -14.456,61.651 -14.207,61.9 IC2.3@-13.075,61.9
  Top Layer w0.75: -14.53,61.725 -14.591,61.664 -14.591,60.846 -14.225,60.48 ; -14.147,60.403 -9.945,56.2 0.8,56.2 2.075,57.475 ; 2.125,57.575 L1.2
NetIC3_1: IC3.1 L2.1 | length 2
  Top Layer w0.3: L2.1 IC3.1@-18.052,101.478
NetIC3_4: IC3.4 R20.1 R21.1 | length 4.8
  Top Layer w0.3: IC3.4 R20.1@-13.955,104.095 ; R21.1 R20.1
NetIC4_1: IC4.1 R29.2 R30.1 | length 15.6
  Top Layer w0.2: R29.2 6.225,84.047 6.225,77.8 6.525,77.5 6.886,77.5 7.383,77.003 7.751,77.003 8.013,77.265 8.435,77.265 8.9,77.73 v1(8.9,78.225) ; IC4.1 11.544,79.35 11.875,79.019 v1(11.875,78.725)
  Bottom Layer w0.2: v1@8.9,78.204 v1(8.9,78.225) 9.4,78.725 v1(11.875,78.725) v1@11.875,78.65
NetIC4_3: IC4.3 R37.2 R38.2 | length 116.4
  Top Layer w0.2: v1(9.013,79.263) 9.1,79.35 IC4.3
  Top Layer w0.3: v1(1.1,50.65) 1.1,51.172 R38.2@2.203,52.275 ; R38.2@2.228,52.25 R37.2
  Bottom Layer w0.3: v1(1.1,50.65) 0.725,50.275 -11.325,50.275 -13.325,52.275 -13.325,59.45 -18.425,64.55 -18.425,100.3 -17.05,101.675 -11.325,101.675 -11,101.35 -11,98.097 -9.628,96.725 2.9,96.725 9.025,90.6 9.025,79.275 v1(9.013,79.263)
NetIC4_6: IC4.6 R24.2 | length 5.9
  Top Layer w0.2: R24.2 7.922,76.203 7.925,76.2 8.08,76.2 8.342,76.462 10.812,76.462 11.125,76.775 IC4.6@11.125,77.375
NetIC5_1: IC5.1 R23.1 | length 2.4
  Top Layer w0.5: R23.1 IC5.1@-15.25,66.104
NetIC6_1: IC6.1 R40.1 R41.2 | length 5.2
  Top Layer w0.3: R41.2 -2.172,99.228 -1.979,99.421 ; R40.1 -1.979,99.421 ; IC6.1 -1.415,98.857 -1.979,99.421
NetIC6_3: IC6.3 R39.1 R41.1 | length 6.9
  Top Layer w0.3: R39.1 -4.204,99.453 R41.1 -3.219,96.915 0.268,96.915 IC6.3
NetQ1_1: Q1.1 Q2.1 R6.2 R7.1 | length 10.2
  Top Layer w0.3: R7.1@-21.425,87.475 Q1.1 -21.425,79.397 R6.2@-19.953,77.925
NetQ1_2: "X1.4 - Piros" Q1.2 R8.2 | length 28.4
  Top Layer w0.3: -26.417,85.598 -26.23,85.598 ; -25.792,85.598 -25.721,85.598 ; -25.605,85.598 -25.721,85.598 ; -24.025,85.55 -23.425,85.55 Q1.2@-23.35,85.475 ; Q1.2@-23.35,85.275 Q1.2@-23.35,85.475 ; Q1.2 Q1.2@-23.35,85.475 ; R8.2@-16.304,98.075 -17.269,99.04 -17.269,99.74 -22.236,99.74 -23.275,98.701 -23.275,92.011 -24.043,91.243 -24.143,91.143 -26.78,91.143 -27.205,90.718 -27.205,87.082 -25.721,85.598
  Top Layer w0.6: -25.7,85.55 -24.025,85.55
NetQ1_3: "X1.5 - Sárga" Q1.3 Q2.3 | length 9.2
  Top Layer w0.4: -23.075,83.275 Q1.3@-22.35,83.275 ; Q2.3 -22.375,80.125 ; -22.375,82 Q1.3@-22.375,83.075 ; Q1.3 Q1.3@-22.35,83.15
  Top Layer w0.6: -25.875,83.275 -23.075,83.275 ; -25.605,83.312 -23.931,83.312 ; -22.375,80.125 -22.375,82
NetQ2_2: Q2.2 Q4.2 R9.1 | length 34.8
  Top Layer w0.4: Q2.2@-23.35,81.35 -23.325,81.325 -23.325,79.95 ; -19.75,86.25 -19.675,86.325 Q4.2@-19.675,87.525
  Top Layer w0.5: -19,76.6 -18.679,76.921 -18.679,79.179
  Top Layer w0.75: -23.325,79.95 -23.325,77.644 -22.281,76.6 -19,76.6 ; -19.75,86.25 -19.75,80.25 -18.679,79.179
  Top Layer w0.9: -26.025,73.661 -26.4,74.036 -26.4,77.776 -26.365,77.776 -25.496,78.644 -24.683,78.644 -23.377,79.95 -23.325,79.95
  Top Layer w1.2: -26.025,73.661 -26.025,68.575 -25.425,67.975 R9.1
NetQ3_1: Q3.1 Q4.1 R11.1 R12.1 | length 22.9
  Top Layer w0.4: R11.1 -19.85,98.3 -21.3,98.3 -21.485,98.115 -21.925,97.675 -21.925,92.916 -21.485,92.476 ; R12.1@-17.85,82.65 Q4.1@-17.85,87.55 ; Q4.1 Q4.1@-17.85,87.55 ; -21.485,92.476 -21.485,92.475 -20.56,91.55 Q3.1@-20.559,91.55 ; -21.485,92.476 Q3.1@-20.559,91.55 ; Q3.1@-20.559,91.55 Q3.1 -20.425,90.075 -19.65,89.3 -18.735,89.3 -18.075,88.64 -18.075,87.775 Q4.1@-17.85,87.55
NetQ3_2: "X1.2 - Zöld" Q3.2 R10.1 | length 18.4
  Top Layer w0.6: -22.73,91.53 -22.625,91.636 -22.625,98.432 -21.967,99.09 -18.375,99.09 -17.312,98.027 -17.312,97.233 R10.1@-16.529,96.45
  Top Layer w0.75: -25.605,90.043 -24.218,90.043 -22.73,91.53
NetQ3_3: "X1.3 - Kék" Q3.3 Q4.3 | length 10.3
  Top Layer w0.4: Q4.3 -18.775,86.225
  Top Layer w0.5: -26.23,87.757 -25.925,87.757
  Top Layer w0.6: -25.153,87.65 -24.193,88.61 -20.315,88.61 -20.305,88.6 -19.025,88.6 -18.775,88.35 -18.775,86.225
NetQ5_1: Q5.1 R23.2 R32.1 | length 3.1
  Top Layer w0.3: R32.1@-16.875,64.125 R23.2@-16.875,65.697 ; R32.1 -16.871,62.496 Q5.1@-16.85,62.475
NetQ6_2: Q6.2 R30.2 | length 5.5
  Top Layer w0.3: R30.2 7.803,79.053 9.15,80.4 Q6.2
NetQ6_3: pad.4 Q6.3 | length 52.2
  Top Layer w0.3: Q6.3@11.075,83.2 11.075,82.564 13.3,80.339 pad.4 ; v1(11.525,81.775) 11.631,81.669 11.944,81.669
  Bottom Layer w0.3: 15.446,78.325 15.9,77.871 15.9,76.8
  Bottom Layer w0.5: 1.95,48.35 1.95,51.175 14.55,63.775 14.55,75.45 15.9,76.8 ; v1(11.525,81.775) 13.225,81.775 14.325,80.675 14.325,79.575 15.55,78.35
  Bottom Layer w1.5: v2(2,43.95) 2,49.818
  other v2: 2,19.95 2,27.95 2,35.95
NetR22_2: pad.6 R22.2 R28.2 | length 8.5
  Top Layer w0.2: R22.2 7.25,73.975 7.629,74.354 10.193,74.354 R28.2
  Top Layer w0.5: R28.2@11,73.6 12.703,75.303 pad.6
NetR25_2: pad.3@13.325,82.589 R25.2 | length 4.4
  Top Layer w0.3: R25.2@11.128,85.05 11.128,84.597 pad.3@13.15,82.575 ; pad.3@12.725,82.575 pad.3@12.775,82.575 ; pad.3@12.925,82.425 pad.3@12.775,82.575 ; pad.3@13.275,82.45 pad.3@13.15,82.575 ; pad.3@13.375,82.575 pad.3@13.15,82.575 ; pad.3@12.775,82.575 pad.3@13.15,82.575
PV.: C5.1 L1.1 pad.9 R13.2 | length 13.4
  Top Layer w0.75: L1.1 6.075,64.1 6.975,65 ; 6.925,64.85 R13.2@6.925,66.55 ; R13.2 7.354,66.6 C5.1@9.325,66.6
  Top Layer w1: C5.1@9.575,66.6 11.609,68.634 pad.9@13.327,68.634
RXD/VCC: IC1.21 R38.1 X3.1 | length 102.6
  Top Layer w0.3: v1(-1.175,51.975) -0.875,52.275 R38.1@0.171,52.275 ; v1(-0.525,88.175) -0.525,87.775 0.7,86.55 ; IC1.21 1.723,85.527 0.7,86.55 ; X3.1@7.675,88.975 1.45,88.975 0.7,88.225 0.7,86.55
  Bottom Layer w0.3: v1(-16.469,79.65) -17.094,79.025 -17.6,79.025 ; v1(-1.175,51.975) -2.875,51.975 -4.05,50.8 -10.625,50.8 -12.75,52.925 -12.75,53.487 -12.675,53.562 -12.675,59.925 -17.6,64.85 -17.6,79.025 ; v1(-0.525,88.175) -4.718,88.175 -15,98.457 -15,100.525 -15.6,101.125 -16.2,101.125 -17.6,99.725 -17.6,79.025
SCL: IC7.4 R31.1 R35.1 | length 65
  Top Layer w0.2: v1@-4.2,53.025 -4.225,53.05 v1(-4.225,53.025) -4.183,52.983 IC7.4
  Top Layer w0.3: R31.1 v1(-12.125,53.228) ; v1@-4.2,53.025 v1@-4.183,53.008 ; R35.1 v1@8.475,81.804
  Bottom Layer w0.3: v1(-12.125,53.228) -11.701,53.652 -7.152,53.652 -6.475,52.975 ; v1@-4.341,52.9 -4.941,52.3 -5.85,52.3 -6.475,52.925 -6.475,52.975 ; v1@8.475,81.675 v1(8.4,81.675) 7.85,81.675 6.9,80.725 6.9,75.675 5.7,74.475 -12.575,74.475 -14.225,72.825 -14.225,64.45 -6.475,56.7 -6.475,52.975
SDA/DHT: IC7.3 R19.1 R27.2 R28.1 R36.1 | length 61.1
  Top Layer w0.2: v1(-5.2,52.925) -4.833,52.558 IC7.3
  Top Layer w0.3: R19.1 -9.068,53.161 -5.436,53.161 v1(-5.2,52.925) ; v1(7.518,75.35) 8.797,75.35 R27.2 10.849,75.578 R28.1 ; R36.1@7.679,80.625 v1(8.35,80.625)
  Bottom Layer w0.3: v1@-5.2,53.1 -5.2,56.5 -13.4,64.7 -13.4,72.6 -12.6,73.4 5.332,73.4 v1@7.4,75.468 ; v1(7.518,75.35) v1@7.4,75.468 ; v1@8.325,80.625 7.9,80.2 7.9,77.675 7.4,77.175 v1@7.4,75.468
VCC: C1.1 C2.1 C3.1 C4.+ C11.1 C12.1 C13.1 C14.1 D1.K IC1.8 IC3.6 IC4.5 IC5.3 IC6.5 IC7.2 IC7.6 IC7.8 L2.2 pad.5 pad.10 R3.1 R4.2 R9.2 R14.1 R16.1 R18.1 R19.2 R31.2 R33.2 R39.2 R42.1 X3.6 | length 390.5
  Top Layer w0.2: C12.1@-7.379,49.925 C12.1 -6.846,50.271 -6.75,50.175 -6.147,50.175 IC7.8 ; IC7.2@-5.483,51.956 -5.483,51.333 -4.839,50.689 IC7.6 -4.839,49.714 -4.5,49.375 ; IC7.6@-4.914,49.933 IC7.6@-4.914,50.264 ; IC4.5@10.475,77.325 10.475,78.05 10.625,78.2 11.512,78.2 12.123,77.589 pad.5 ; pad.5@13.036,77.575 pad.5@13.375,77.575 ; v5@15.064,77.589 v5@15.075,77.6
  Top Layer w0.3: -27.425,86.225 -27.425,86.453 ; -27.405,86.221 -27.405,86.433 -27.425,86.453 ; -26.987,91.643 -27.705,90.925 -27.705,86.875 -27.425,86.595 -27.425,86.453 ; C4.+ -24.875,73.854 -25.575,74.554 -25.575,77.434 -25.165,77.844 -24.585,77.844 -24.196,77.455 -24.125,77.455 -24.125,76.919 -23.65,76.444 -23.221,76.444 -22.602,75.825 -18.525,75.825 -17.825,76.525 -16.864,76.525 -16.304,77.085 -15.446,77.085 -14.916,76.555 -11.326,76.555 ; -23.875,92.118 -23.875,92.277 ; L2.2 IC3.6@-17.992,103.978 ; R33.2 -18.61,67.832 -17.755,68.687 -14.838,68.687 -14.125,69.4 -14.097,69.372 IC5.3 -14.097,65.212 -14.275,65.034 ; IC3.6 -17.875,103.703 -17.395,103.222 -16.422,103.222 -16.272,103.072 ; -16.211,61.075 -15.375,61.911 -15.375,63.934 -14.275,65.034 ; -15.175,100.4 -15.075,100.3 -14.675,99.9 -10.403,99.9 C11.1 ; -14.275,65.026 -14.275,65.034 ; v1(-7.9,100.85) -7.9,98.155 -3.349,93.604 R4.2 R4.2@5.55,93.604 ; v1(-3.988,102.794) -3.988,101.803 R39.2 ; R16.1 -3.699,62.5 -2.449,63.75 -2.275,63.75 -2.1,63.925 R14.1@-2.1,64.65 ; IC6.5 3.962,98.857 v11(4.318,99.212) ; 9.875,63.5 D1.K ; pad.5 15.064,77.589 15.086,77.589 v5(15.125,77.55)
  Top Layer w0.4: -11.326,76.555 -10.9,76.98 -10.9,77.025 ; R19.2@-10,50.2 R19.2@-9.363,50.2 ; C12.1@-7.379,49.925 -6.829,49.375 -4.5,49.375 -3.471,49.375 C13.1
  Top Layer w0.5: R42.1 v3(-27.584,59.512) ; -26.987,91.744 -27.008,91.764 -24.388,91.764 -23.875,92.277 -23.875,98.95 -22.485,100.34 -16.72,100.34 -16.72,100.039 -16.281,99.6 -15.659,99.6 -15.201,100.058 -15.075,100.058 -15.075,100.3 -15.075,101.875 -15.462,102.263 ; C4.+ -24.081,71.2 ; v3(-22.936,61.265) -22.365,61.265 ; -21.25,62.95 -22.365,61.835 -22.365,61.265 ; -16.272,103.072 -15.509,102.309 ; R3.1@-14.9,91 -12.525,91 -8.625,87.1 -8.625,81.475 -8.65,81.45 -8.65,79.23 -10.9,76.98 ; R31.2@-12.3,50.225 -12.8,50.225 -13.325,50.75 -13.325,53.693 -16.432,56.8 -19,56.8 -19.925,57.725 -19.925,58.825 -22.365,61.265 ; R31.2@-12.275,50.25 R19.2@-9.95,50.25 ; R19.2 C12.1@-7.749,50.247 ; C11.1 -9.297,100.85 v1(-7.9,100.85) ; R18.1 9.721,60.3 9.721,58.2 ; v1(12.3,100.225) 12.58,100.505 X3.6
  Top Layer w0.6: -27.405,86.221 -27.405,70.97 -27.15,70.715 -27.15,62.063 -26.637,61.55 -24.163,61.55 -23.65,62.063 -23.65,62.075 -22.532,63.193 ; 3.55,64.725 4.125,64.15 4.125,57.637 4.987,56.775
  Top Layer w0.75: -22.999,63.193 -22.532,63.193 -21.493,63.193 -21.25,62.95 -21.225,62.95 -19.35,61.075 -16.411,61.075 -16.036,60.7 ; -22,69.475 -22,69.4 -22,67.404 R9.2 ; IC1.8@-12.775,73.525 -13.829,72.471 -13.85,72.45 -12.625,72.45 v1(-12.375,72.2) ; v1(-11.425,72.2) v1(-12.375,72.2) ; v1@-11.405,72.18 v1(-11.405,71.425) -12.168,71.425 -12.375,71.632 v1(-12.375,72.2) ; R16.1@-4.1,62.575 -2.638,61.113 -0.354,61.113 0.1,61.567 0.1,63.888 1.037,64.825 3.45,64.825 3.55,64.725 ; 4.987,56.775 8.296,56.775 9.721,58.2 ; R18.1@8.675,61.4 8.675,62.6 9.175,63.1 10.575,63.1 11.275,63.8 ; v1@12.35,65.125 12.35,64.8 ; 13.125,65.55 12.75,65.175 12.35,65.575 12.35,64.8 ; pad.10@13.375,66.25 v1(13.375,65.175) 13.375,64.8 ; 12.35,64.8 13.375,64.8 ; 12.35,64.8 v1(12.35,64.178) v1(13.375,64.178) 13.375,64.8
  Top Layer w1: -22.999,63.193 -23.724,63.917 -23.724,65.68 R9.2@-22,67.404 ; -22,69.4 C3.1@-20.2,71.2 ; C3.1@-20.325,71.275 -20.325,71.2 C3.1@-20.2,71.2 ; C3.1 C3.1@-20.2,71.2 ; C2.1 -16.708,71.225 -15.462,72.471 C1.1 -13.829,72.471 -12.646,72.471 -12.646,73.396 IC1.8@-12.775,73.525 ; C2.1@-17.5,71.2 C3.1@-20.2,71.2 ; -16.036,60.7 -10.411,55.075 8.965,55.075 8.965,55.1 8.99,55.1 12.011,58.121 12.011,62.246 11.275,62.982 11.275,63.8 11.275,65.7 ; 11.325,65.85 11.823,66.348
  Top Layer w1.2: -23.825,71.2 C3.1@-20.325,71.2
  Bottom Layer w0.3: v1(-3.988,102.794) -3.988,101.638 -3.2,100.85 ; -1.5,100.175 -1.5,100.225 ; v11(4.318,99.212) 4.318,99.666 4.877,100.225
  Bottom Layer w0.5: v3(-27.584,59.512) -25.832,61.265 v3(-22.936,61.265) ; v1(-7.9,100.85) -3.2,100.85 -2.575,100.225 -1.5,100.225 4.877,100.225 v1(12.3,100.225)
  Bottom Layer w0.75: v1(-12.268,71.425) -12.268,72.093 v1@-11.6,71.425 ; 13.375,64.8 v1(13.375,65.175) 13.375,75.75 v5@15.125,77.5
  Bottom Layer w1: v1(-12.375,72.2) -11.725,72.2 ; 13.3,64.8 13.35,64.75 13.475,64.75
  Bottom Layer w1.5: -11.725,72.2 -4.325,64.8 13.3,64.8 13.35,64.8
  other v1: 12.375,65.175
pads on no net: IC1.9 IC1.10 IC1.11 IC1.12 IC1.13 IC1.14 L2.0 R34.2
copper on no net: | length 8.6
  Top Layer w0.2: -9.975,71.525 -9.975,72.423
  Top Layer w0.3: 13.125,84.875 13.325,84.875
  Top Layer w0.5: -14.525,50.222 -14.5,50.197 -14.5,47.6
  Top Layer w1.5: v2(-14.65,43.975) -14.478,44.147 -14.478,48.793
  other v2: -14.65,19.975 -14.65,27.975 -14.65,35.975

## Polygon pours and split planes (outlines as drawn)
GND on Top Layer "GND" (solid, remove dead copper, pour order 2): -28.426,57.981 -28.426,99.584 -28.426,99.659 -19.411,108.67 7.434,108.67 7.434,108.645 16.249,99.834 16.249,57.756 16.249,57.731 7.484,48.97 7.459,48.995 -19.411,48.995 -28.426,58.006
GND on Bottom Layer "GND" (solid, pour order 5): -28.464,57.996 -28.464,99.656 -19.453,108.663 -19.428,108.638 7.402,108.638 16.186,99.856 16.186,57.746 16.136,57.746 7.402,49.013 -19.478,49.013 -28.464,57.996

## Other copper
Top Layer:
  rectangle net NetQ6_3: -0.008,11.925 3.925,48.448
  rectangle net VCC: -12.375,71.425 -11.405,72.2
  rectangle net GND: -7.137,75.971 -2.972,77.927
  rectangle: -16.658,11.95 -12.725,48.473
  rectangle: -16.658,11.95 -12.725,48.473
Bottom Layer:
  rectangle: -16.65,11.95 -12.725,48.475
  rectangle net NetQ6_3: 0,11.925 3.925,48.45
  rectangle net VCC: -12.375,71.425 -11.405,72.2
  rectangle net VCC: -11.405,71.425 -11.176,71.501
  text "PCB prototype v3" at -5.225,57.775 h0.8

## Silkscreen, mask and mechanical layers (free items; w line width, h text height)
Top Overlay:
  text "BAT GND." at -27.091,61.042 h0.6
Bottom Overlay:
  text "PCB prototype v3" at -9.95,62.275 h1.25
  text "2018.1" at -7.375,59.8 h1.25
Top Paste:
  rectangle: -16.658,11.95 -12.725,48.473
  rectangle: -0.008,11.925 3.925,48.448
Bottom Paste:
  rectangle: -16.658,11.975 -12.725,48.498
  rectangle: -0.008,11.925 3.925,48.448
Mechanical 1:
  lines w0.4: -17.025,48.85 -19.504,48.85 -28.6,57.946 -28.6,99.726 -19.49,108.836 7.539,108.836 16.4,99.975 16.4,57.726 7.574,48.9 4.25,48.9 4.25,11.675 1.963,9.387 -0.35,11.7 -0.35,48.825 ; -17,48.85 -17,11.725 -14.687,9.413 -12.4,11.7 -12.4,48.925 ; -12.35,48.825 -0.4,48.825

## Text inside footprints (layer, text, board x,y; h text height)
C4: Top Overlay "+" at -25.2,70.4 h0.89 r90
IC1: Mechanical 13 "ANTENNA AREA" at -12.76,95.499 h0.25; Mechanical 13 "CUTOUT POLYGON" at -12.76,94.991 h0.25; Top Overlay "MISO" at -7.675,73 h0.6 r90; Top Overlay "RST" at -11.075,87.1 h0.7; Top Overlay "ADC" at -11.075,85.1 h0.7; Top Overlay "EN" at -11.085,83.14 h0.7; Top Overlay "GPIO16" at -11.075,81.1 h0.7; Top Overlay "GPIO14" at -11.12,79.073 h0.7; Top Overlay "GPIO12" at -11.075,77.2 h0.7; Top Overlay "GPIO13" at -11.175,75.7 h0.6; Top Overlay "Vcc" at -11.175,74 h0.6; Top Overlay "CS0" at -10.92,72.973 h0.6; Top Overlay "GPIO9*" at -5.575,73.2 h0.7 r90; Top Overlay "GPIO10*" at -3.575,73.2 h0.7 r90; Top Overlay "MOSI" at -1.775,73.1 h0.6 r90; Top Overlay "GND" at -0.12,73.873 h0.6; Top Overlay "GPIO15" at -1.775,75.4 h0.6; Top Overlay "GPIO2" at -1.975,77.2 h0.7; Top Overlay "GPIO0" at -1.975,79.1 h0.7; Top Overlay "GPIO4" at -2.075,81.1 h0.7; Top Overlay "GPIO5" at -2.075,83 h0.7; Top Overlay "RXD0" at -1.475,85.1 h0.7; Top Overlay "TXD0" at -1.475,87.1 h0.7; Top Overlay "*only ESP12-D" at -9.675,89 h0.7